# EAGLE board OVC3860_Bluetooth_Receiver (EAGLE 6.4)
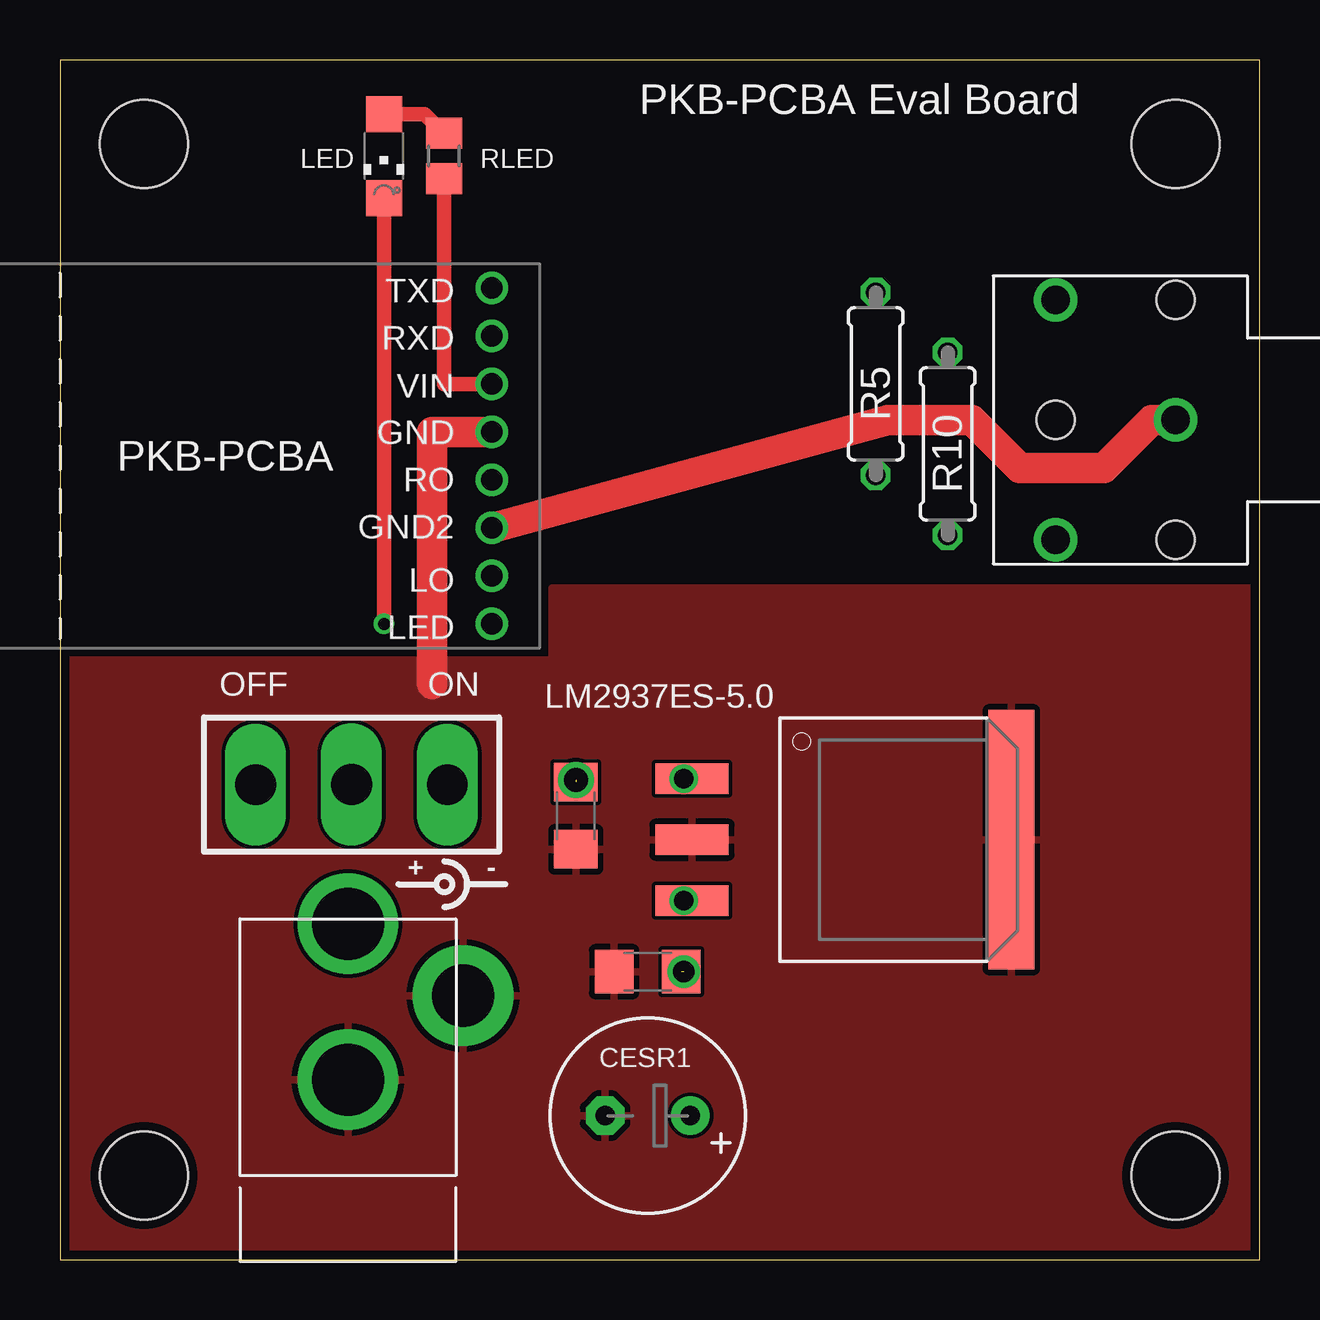
[diagram p0: board, top side]
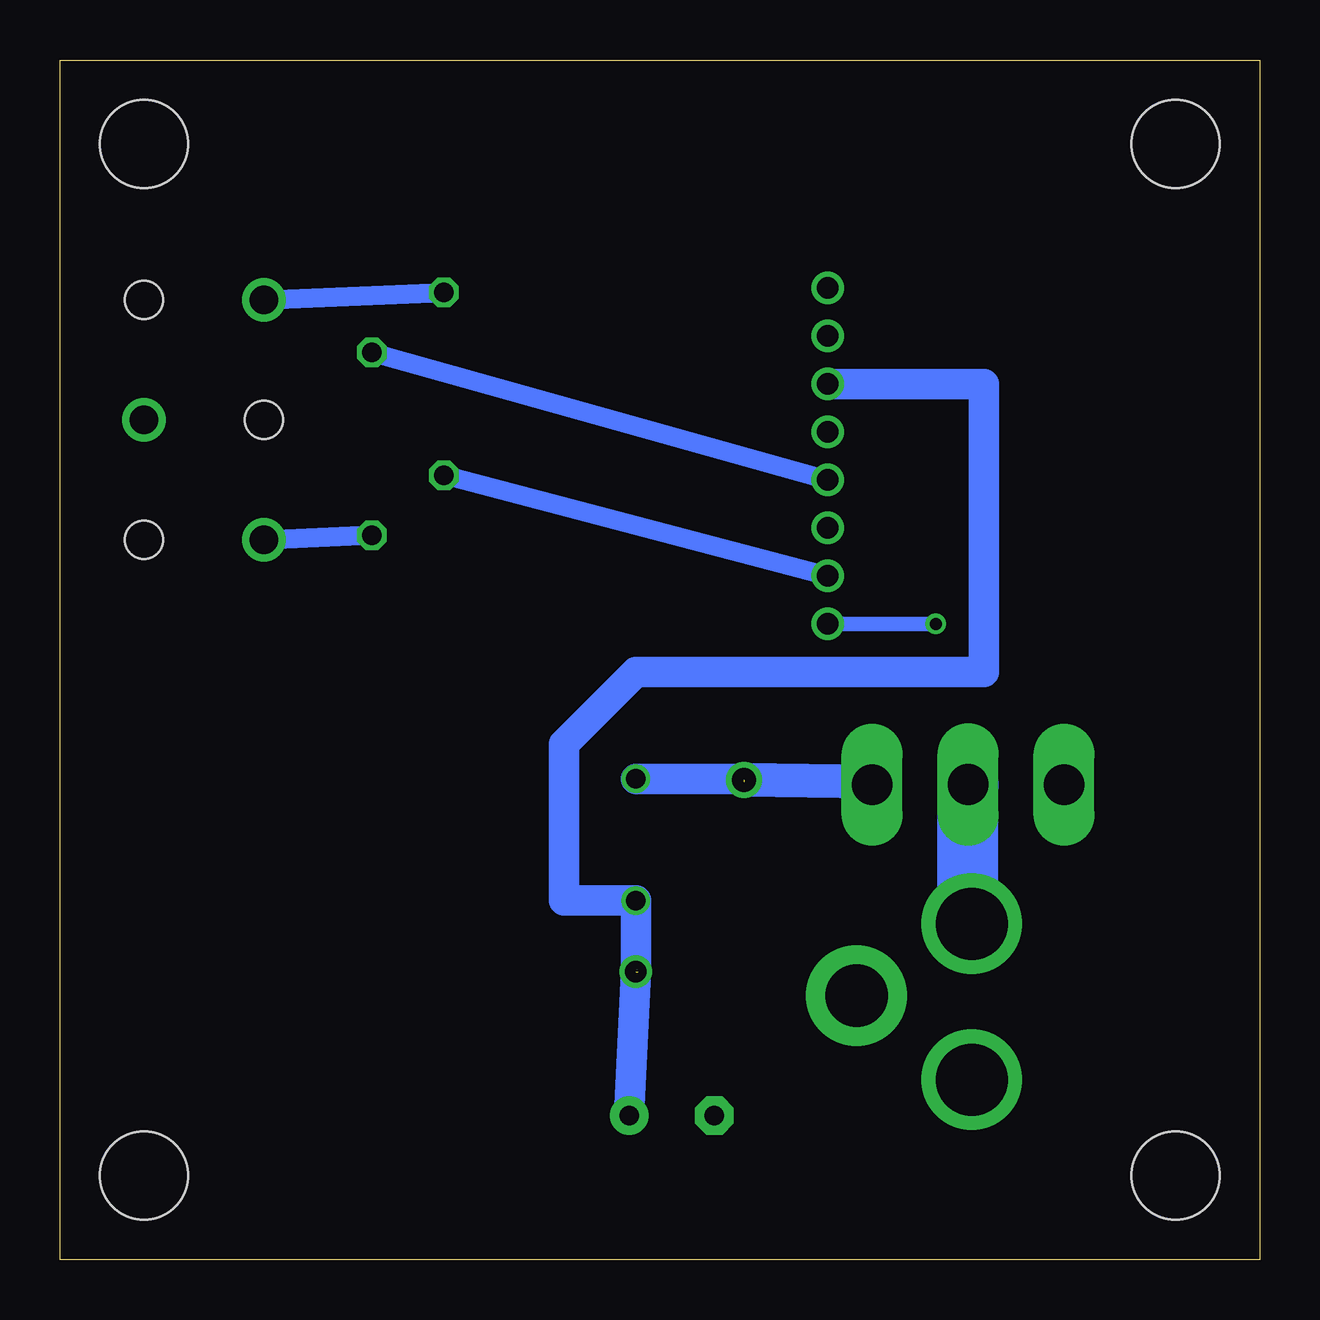
[diagram p1: board, bottom side, seen from below]

Size 50 x 50 mm. Coordinates in mm from the lower left corner, seen from the top.
Outline: 0,50 0,0 50,0 50,50 0,50
Copper layers (1*16): Top 0.0356mm / dielectric 1.5011mm / Bottom 0.0356mm
Design rules "DorkbotPDXDRC": minimum track width 6mil, minimum drill 13mil, track to track 6mil, track to pad 6mil, pad to pad 6mil, via to via 6mil, smd to smd 6mil, copper to edge 15mil, drill to drill 6mil, minimum pad ring 7mil, minimum via ring 7mil, stop-mask expansion 4mil, vias tented up to drill 0mil, thermal gap 10mil
Holes 3.66 mm at 3.5,46.5 3.5,3.5 46.5,3.5 46.5,46.5

## Footprints (pad centres in the part's own frame; a part is rotated, then mirrored left to right if it is on the bottom)
E3,5-8 = drill 0.813 pad 1.6: + -1.778,0 | drill 0.813 pad 1.6 octagon: - 1.778,0
C1206 = smd 1.6 x 1.8: 1 -1.4,0; 2 1.4,0
CHIPLED_1206 = smd 1.5 x 1.5: A 0,-1.75; C 0,1.75
TO-263-3 = smd 1.27 x 3.048: 1 -2.54,-3.658; 2 0,-3.658; 3 2.54,-3.658 | smd 10.795 x 1.905: GND 0,9.652
A-4118 = drill 2.6 pad 4.2: P$2 11,-4.8 | drill 3 pad 4.2: P$3 7.5,0; P$4 14,0
103-12100-EV = drill 1.7 long: 1 2.15,2.794; 2 6.15,2.8; 3 10.15,2.794
0207/7 = drill 0.813 octagon: 1 -3.81,0; 2 3.81,0
R0805 = smd 1.3 x 1.5: 1 -0.95,0; 2 0.95,0
STX-3120-3B = drill 1.2: 1 6.5,0; 2 11.5,5; 5 11.5,-5 | hole 1.6: 11.5,0; 6.5,5; 6.5,-5
PKB-PCBA = drill 0.9: GND 23.5,1; GND2 23.5,-3; LED 23.5,-7; LO 23.5,-5; RO 23.5,-1; RXD 23.5,5; TXD 23.5,7; VIN 23.5,3

## Placement (x,y rotation side)
CESR1  220uF  [E3,5-8]  24.5,6 180 top
CESR2  1uF  [C1206]  24.5,12 180 top
CIN1  10uF  [C1206]  21.5,18.5 270 top
LED1  [CHIPLED_1206]  13.5,46 180 top
LM2937ES-5.0  LM340S-5.0  [TO-263-3]  30,17.5 270 top
PWRJK  A-4118_DCPOWJACK  [A-4118]  12,0 90 top
PWRSW  103-12100-EV  [103-12100-EV]  6,17 0 top
R5  8  [0207/7]  34,36.5 270 top
R10  8  [0207/7]  37,34 90 top
RLED  1K  [R0805]  16,46 90 top
U$2  STX-3120-3B  [STX-3120-3B]  53,35 180 top
U$3  PKB-PCBA  [PKB-PCBA]  -5.5,33.5 0 top

## Library data of the parts
CESR1 CESR2 CIN1 R5 R10 RLED = rcl
LED1 = led
LM2937ES-5.0 = VREG-yz
PWRJK PWRSW U$2 U$3 = yz-parts

## Nets
+12VIN: CIN1.1 LM2937ES-5.0.1 PWRSW.3
GND: CESR1.- CESR2.2 CIN1.2 LM2937ES-5.0.2 LM2937ES-5.0.GND PWRJK.P$2 PWRJK.P$3 U$3.GND
N$1: CESR1.+ CESR2.1 LM2937ES-5.0.3 RLED.1 U$3.VIN
N$2: U$2.1 U$3.GND2
N$3: R5.1 U$2.5
N$4: R10.1 U$2.2
N$5: LED1.C U$3.LED
N$6: LED1.A RLED.2
N$7: R5.2 U$3.LO
N$8: R10.2 U$3.RO
N$18: PWRJK.P$4 PWRSW.2

## Tracks (layer width: path | path; a pad name or v marks a point on that pad's centre or on a via)
+12VIN  (via drill 0.8, 1)  (1 unrouted)
  Top 0.813: v26,20.04 26.34,20 LM2937ES-5.0.1
  Bottom 1.27: v21.5,20 21.54,20.04 v26,20.04
  Bottom 1.422: v21.5,20 16.15,19.9 PWRSW.3
GND
  Top 1.27: U$3.GND 15.5,34.5 15.5,24
  pour Top: 0,25 20.5,25 20.5,28 50,28 50,0 0,0
N$1  (via drill 0.8, 0.9)  (1 unrouted)
  Top 0.406: v26,14.96 LM2937ES-5.0.3
  Top 0.61: RLED.1 16,36.5 U$3.VIN
  Bottom 1.27: CESR1.+ v26,12 v26,14.96 29,14.96 29,21.5 26,24.5 11.5,24.5 11.5,36.5 U$3.VIN
N$2
  Top 1.27: U$3.GND2 34.5,35 38,35 40,33 43.5,33 45.5,35 U$2.1
N$3
  Bottom 0.813: R5.1 U$2.5
N$4
  Bottom 0.813: R10.1 U$2.2
N$5  (via drill 0.5)
  Top 0.61: LED1.C v13.5,26.5
  Bottom 0.61: v13.5,26.5 U$3.LED
N$6
  Top 0.61: RLED.2 15.2,47.75 LED1.A
N$7
  Bottom 0.813: U$3.LO R5.2
N$8
  Bottom 0.813: U$3.RO R10.2
N$18
  Bottom 2.54: PWRJK.P$4 12.15,14.15 PWRSW.2

## Text on the board
tNames: PKB-PCBA Eval Board | LED | OFF | ON | + | -
tStop: YZ